# EAGLE board espMDL_MCP3425_3A (EAGLE 7.5.0)
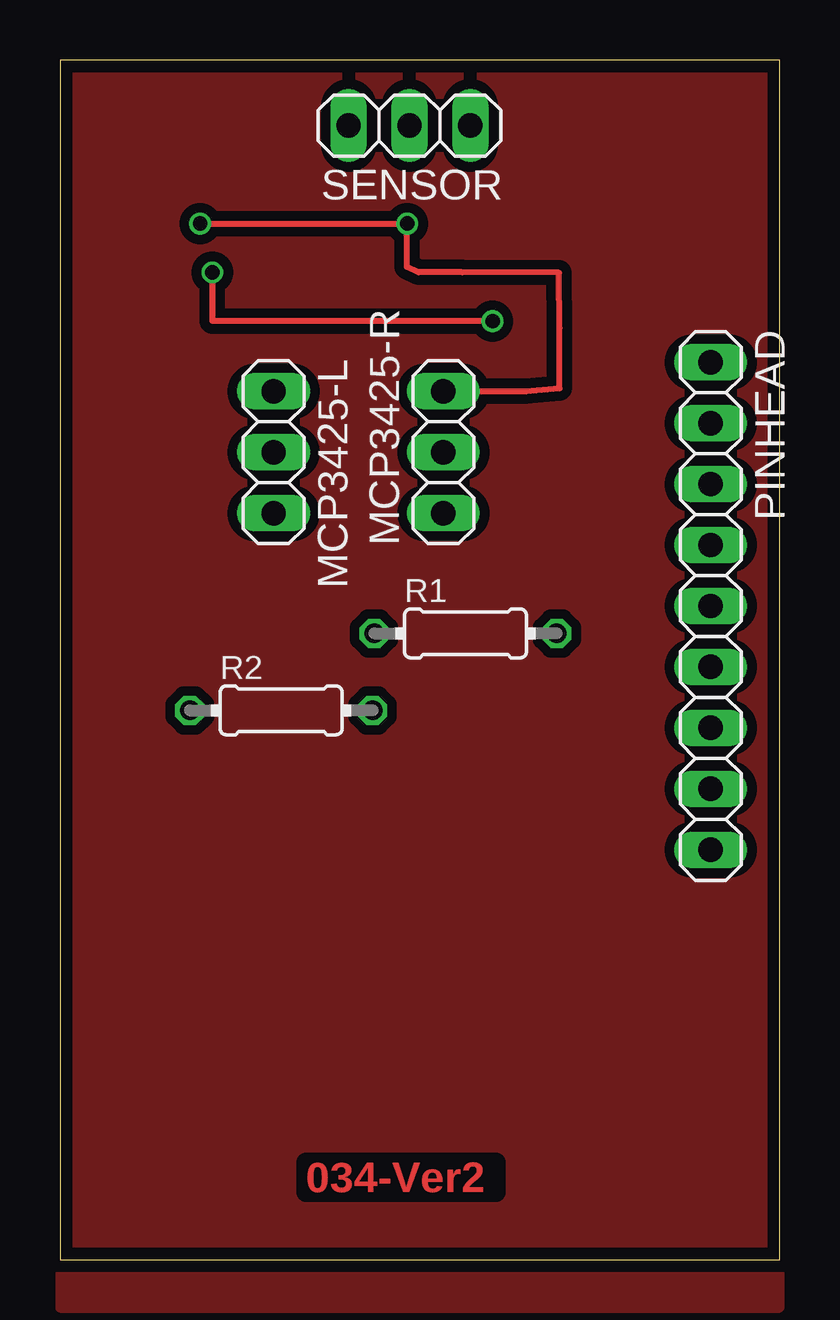
[diagram p0: board, top side]
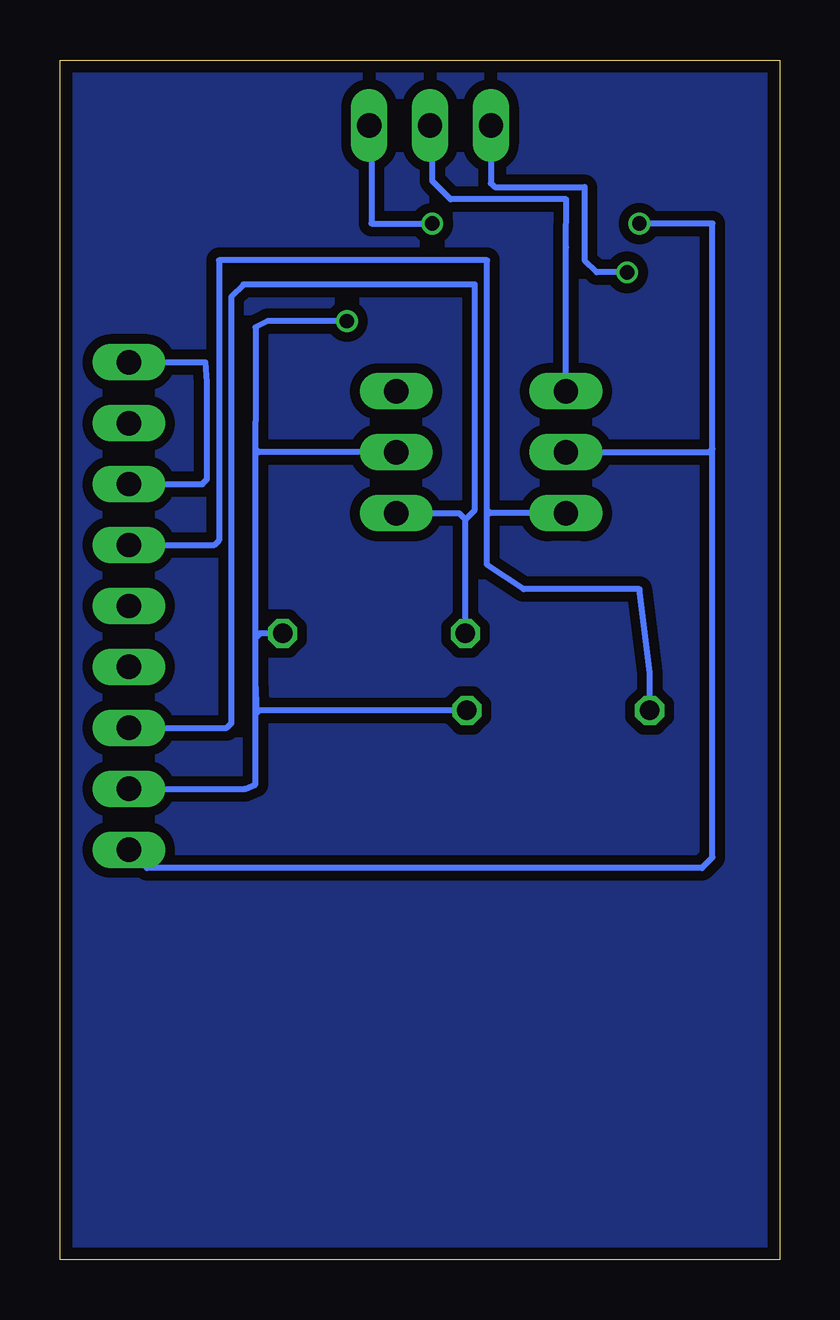
[diagram p1: board, bottom side, seen from below]

Size 30 x 50 mm. Coordinates in mm from the lower left corner, seen from the top.
Outline: 0,0 30,0 30,50 0,50 0,0
Copper layers (1*16): Top 0.035mm / dielectric 1.6mm / Bottom 0.035mm
Design rules "Elecrow_2-layer_PCB_eagle_rule": minimum track width 6mil, minimum drill 12mil, track to track 6mil, track to pad 6mil, pad to pad 6mil, via to via 8mil, smd to smd 0mil, copper to edge 20mil, drill to drill 10mil, minimum pad ring 6mil, minimum via ring 6mil, stop-mask expansion 0mil, vias tented up to drill 100mil, thermal gap 10mil

## Footprints (pad centres in the part's own frame; a part is rotated, then mirrored left to right if it is on the bottom)
1X03 = drill 1.016 long: 1 -2.54,0; 2 0,0; 3 2.54,0
1X09 = drill 1.016 long: 1 -10.16,0; 2 -7.62,0; 3 -5.08,0; 4 -2.54,0; 5 0,0; 6 2.54,0; 7 5.08,0; 8 7.62,0; 9 10.16,0
0204/7 = drill 0.813 octagon: 1 -3.81,0; 2 3.81,0

## Placement (x,y rotation side)
MCP3425-L  [1X03]  8.9,33.65 270 top
MCP3425-R  [1X03]  15.98,33.65 90 top
PINHEAD  [1X09]  27.13,27.24 270 top
R1  10K  [0204/7]  16.91,26.1 0 top
R2  10K  [0204/7]  9.22,22.89 0 top
SENSOR  [1X03]  14.57,47.27 180 top

## Library data of the parts
MCP3425-L MCP3425-R PINHEAD SENSOR = pinhead
R1 R2 = resistor

## Nets
+3V3: MCP3425-R.2 PINHEAD.8 R1.2 R2.2 SENSOR.3
GND: MCP3425-L.2 MCP3425-R.3 PINHEAD.9 SENSOR.1
N$2: PINHEAD.1 PINHEAD.3
N$3: MCP3425-R.1 PINHEAD.7 R1.1
N$4: MCP3425-L.1 SENSOR.2
N$7: MCP3425-L.3 PINHEAD.4 R2.1

## Tracks (layer width: path | path; a pad name or v marks a point on that pad's centre or on a via)
+3V3  (via drill 0.6)
  Top 0.254: v6.35,41.15 6.35,39.12 v18.03,39.12
  Bottom 0.254: PINHEAD.8 22.29,19.62 21.84,19.81 21.84,23.88 21.85,24.12 | 21.85,24.12 21.79,22.8 21.7,22.89 R2.2 | v18.03,39.12 21.34,39.12 21.84,38.86 21.84,34.92 21.85,34.92 21.85,33.78 | v6.35,41.15 7.62,41.15 8.13,41.66 8.13,44.7 11.87,44.7 12.03,44.86 SENSOR.3 | 21.85,24.12 21.85,25.91 | 21.85,25.91 21.85,33.78 | MCP3425-R.2 21.72,33.65 21.85,33.78 | R1.2 21.66,26.1 21.85,25.91
GND  (via drill 0.6)
  Top 0.254: v5.84,43.18 v14.48,43.18 14.46,41.38 14.95,41.15 16.76,41.15 20.81,41.13 20.83,38.83 20.83,36.32 19.43,36.19 MCP3425-R.3
  Bottom 0.254: 2.79,33.78 2.79,16.76 3.24,16.32 26.37,16.32 PINHEAD.9 | 2.79,33.78 2.79,43.18 v5.84,43.18 | SENSOR.1 17.02,47.18 17.02,43.18 v14.48,43.18 | MCP3425-L.2 2.92,33.65 2.79,33.78
N$1
  pour Bottom (isolate 0.406, no thermals): 0,50 0,0 30,0 30,50
N$2
  Bottom 0.254: PINHEAD.1 23.94,37.4 23.88,36.58 23.88,32.51 24.07,32.32 PINHEAD.3
N$3
  Bottom 0.254: PINHEAD.7 23.05,22.16 22.86,22.35 22.86,40.13 22.35,40.64 12.7,40.64 12.7,31.24 13.1,30.85 | R1.1 13.1,30.85 | MCP3425-R.1 13.36,31.11 13.1,30.85
N$4
  Bottom 0.254: MCP3425-L.1 8.9,42.18 8.89,44.2 13.72,44.2 14.48,44.96 14.48,47.18 SENSOR.2
N$6
  pour Top (isolate 0.406, no thermals): 0,50 0,-2 30,-2 30,50
N$7
  Bottom 0.254: 12.19,31.24 12.19,28.96 10.67,27.94 5.84,27.94 5.41,24.46 R2.1 | 12.19,31.24 12.19,41.66 23.37,41.66 23.37,29.97 23.56,29.78 PINHEAD.4 | MCP3425-L.3 12.06,31.11 12.19,31.24

## Text on the board
Top: 034-Ver2